# Altium PCB BMS ERROR Detection.PcbDoc
Units mil, origin at the board's own origin, x right, y up, seen from the top; angles counter-clockwise.
Board outline 2187.01 x 1799.61 mil, 2 copper layers (Top, Bottom); 9 components, 16 nets, 48 pads, 2 vias.
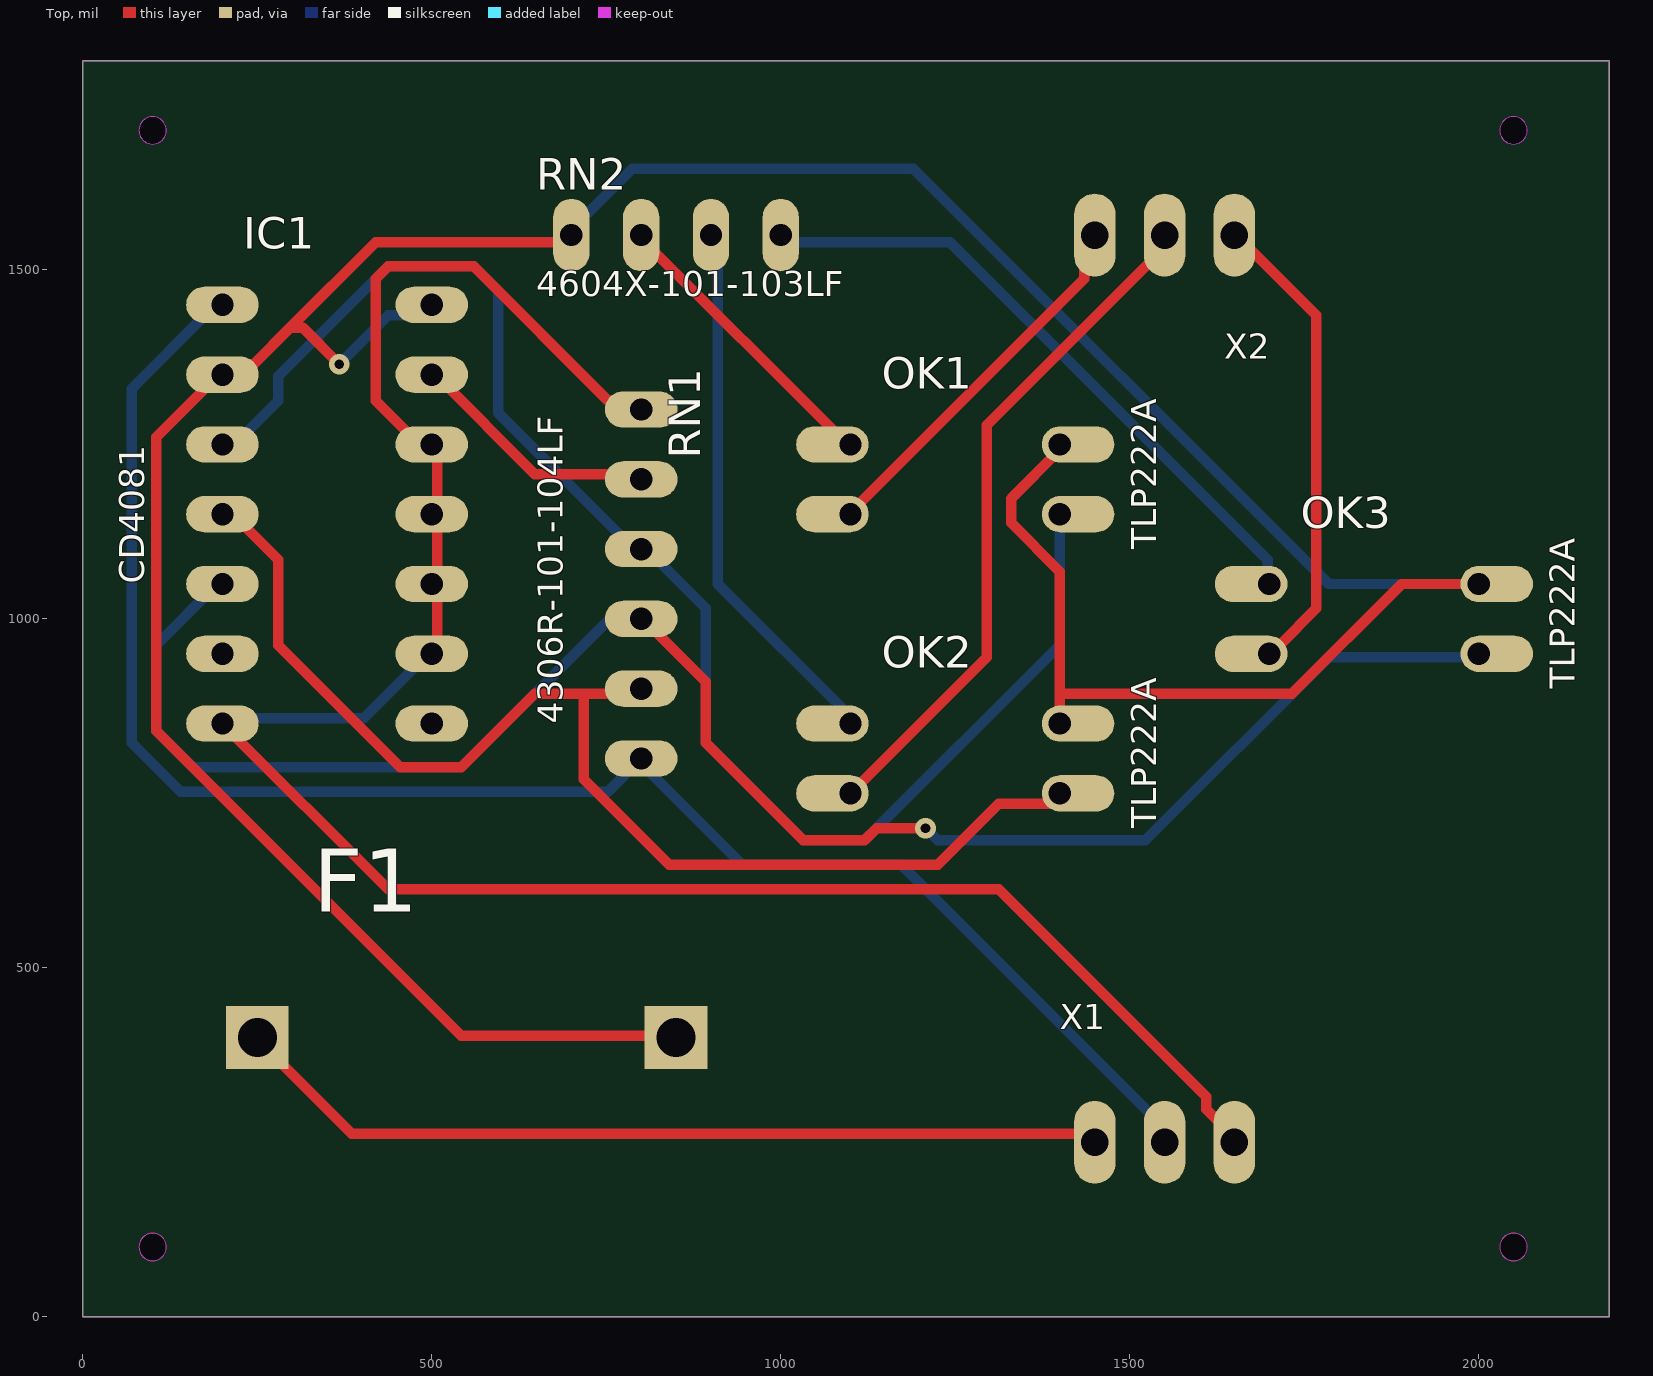
[diagram p0: Top view]
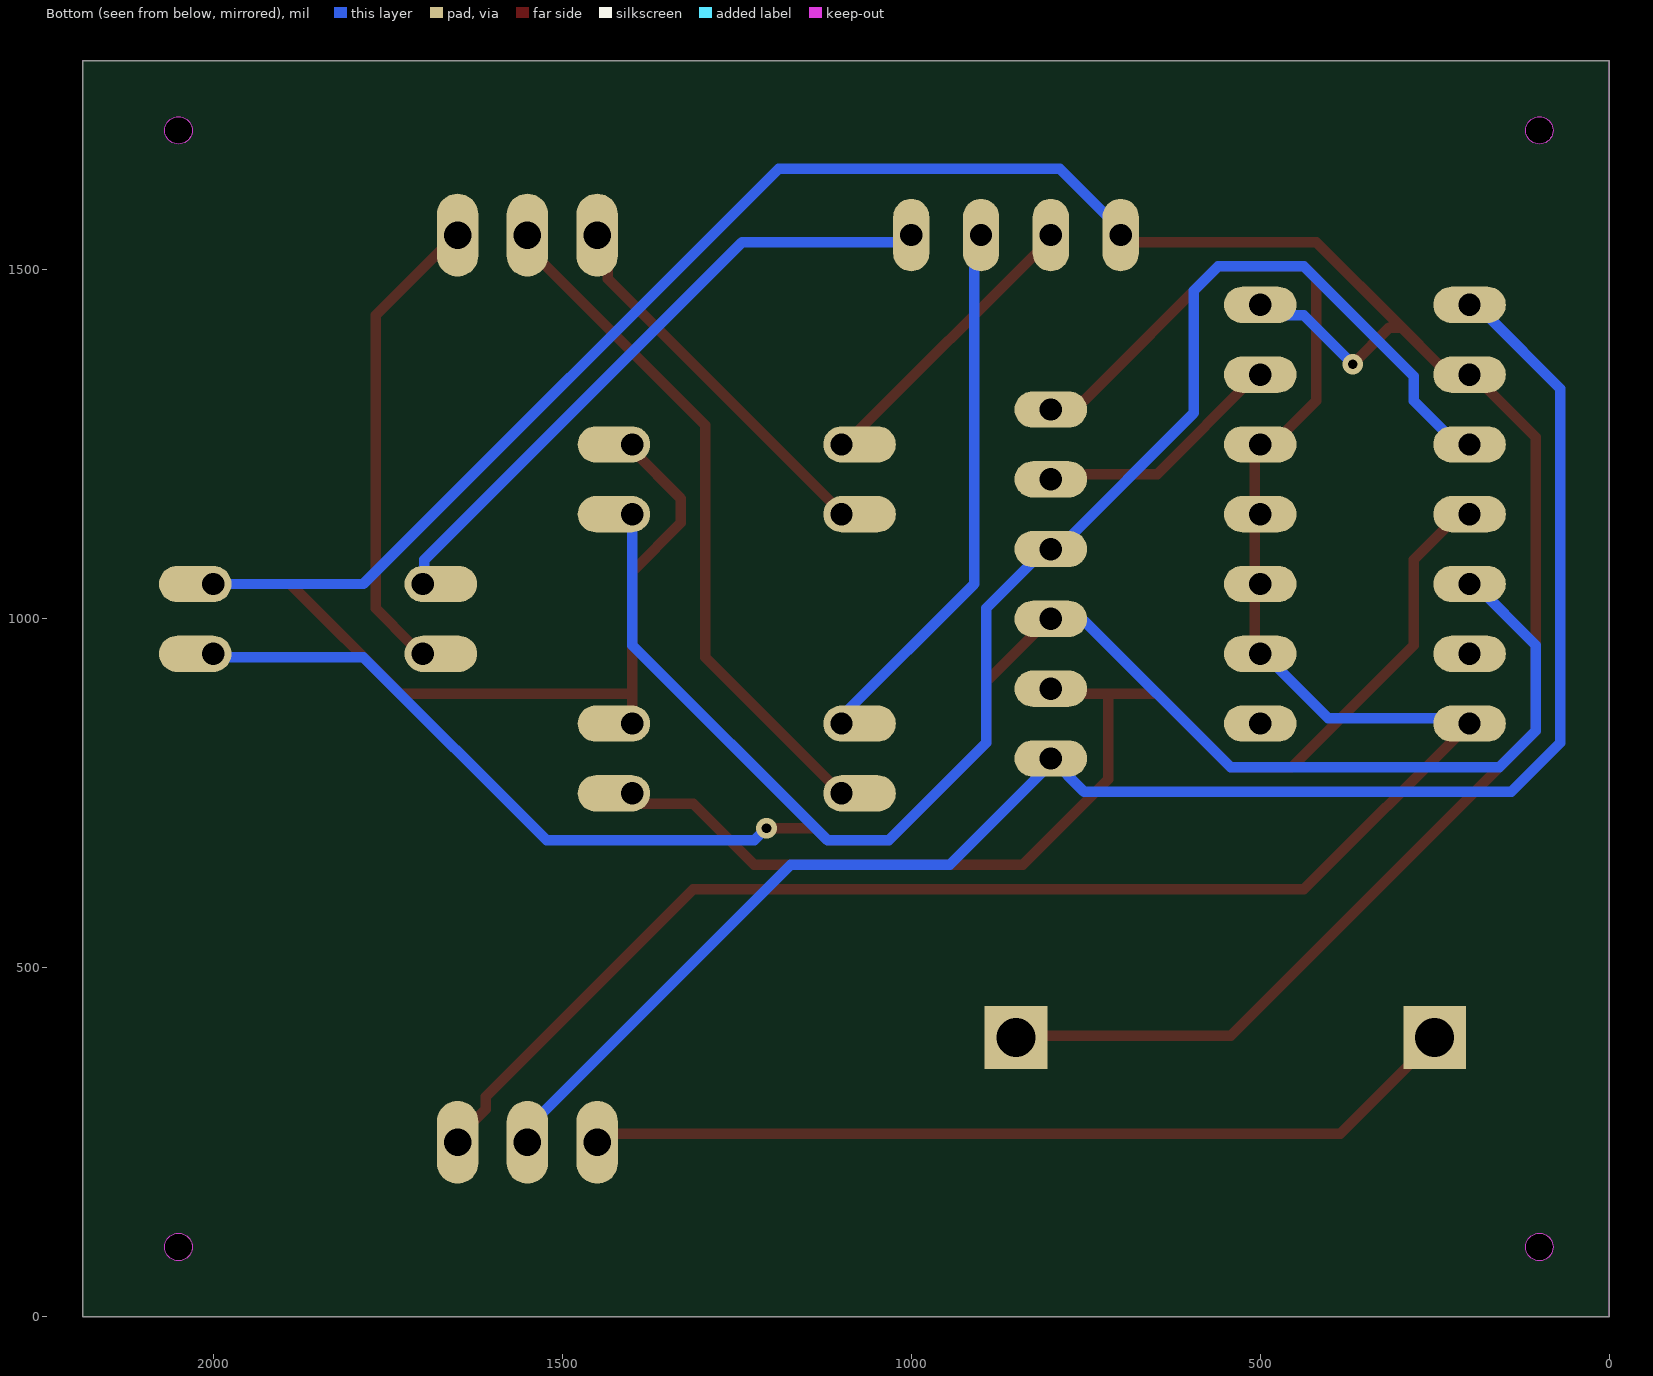
[diagram p1: Bottom view, seen from below]

## Layer stack, top to bottom
Top Solder: solder mask 0.4, Solder Resist, Dk 3.5
Top: signal copper 1.378
Dielectric 1: dielectric 12.6, FR-4, Dk 4.8
Bottom: signal copper 1.378
Bottom Solder: solder mask 0.4, Solder Resist, Dk 3.5

## Board outline
0,1799.61 0,0 2187.01,0 2187.01,1799.61
cut-out: 2050,80.31 ccw(c2050,100) 2069.68,100 ccw(c2050,100) 2050,119.69 ccw(c2050,100) 2030.32,100 ccw(c2050,100)
cut-out: 2050,1680.32 ccw(c2050,1700) 2069.68,1700 ccw(c2050,1700) 2050,1719.68 ccw(c2050,1700) 2030.32,1700 ccw(c2050,1700)
cut-out: 100,1680.32 ccw(c100,1700) 119.69,1700 ccw(c100,1700) 100,1719.68 ccw(c100,1700) 80.31,1700 ccw(c100,1700)
cut-out: 100,80.31 ccw(c100,100) 119.69,100 ccw(c100,100) 100,119.69 ccw(c100,100) 80.31,100 ccw(c100,100)

## Design rules (kind name [scope] priority, off if disabled: settings)
BoardOutlineClearance mdCopperDimension [All] p1: gap=10 ignorepadtopadclearanceinfootprint=FALSE except(0: Arc-SplitContinuation Track-SplitContinuation SMDPad-SplitContinuation THPad-SplitContinuation Via-SplitContinuation Fill-SplitContinuation Poly-SplitContinuation Region-SplitContinuation Text-SplitContinuation; 40: Poly-OutlineEdge Poly-CavityEdge Poly-CutoutEdge Poly-SplitBarrior)
Clearance "Clearance (Same Net)" [All] p1: gap=20 ignorepadtopadclearanceinfootprint=FALSE except(6: SMDPad-SMDPad SMDPad-THPad SMDPad-Via)
Clearance [All] p2: gap=20 ignorepadtopadclearanceinfootprint=FALSE
HoleSize [All] p1: absolutevalues=TRUE maxlimit=100000 minlimit=13.78 maxpercent=80.000 minpercent=20.000
HoleToHoleClearance mdDrill [All] p1: gap=6 allowstackedmicrovias=TRUE
MinimumSolderMaskSliver [All] p1 off: minsoldermaskwidth=10
PasteMaskExpansion mlMinCreamFrame [All] p1: expansion=0
PolygonConnect PolygonConnect_For_PolygonThermal_ON_Width60000_Gap100000 [InPolygonClass('PolygonThermal_ON_Width60000_Gap100000') vs Not IsVia] p1: connectstyle=Relief reliefconductorwidth=6 reliefentries=4 polygonreliefangle="90 Angle" airgapwidth=10
PolygonConnect ThermalVias [IsVia] p2: connectstyle=Direct reliefconductorwidth=10 reliefentries=4 polygonreliefangle="90 Angle" airgapwidth=10
PolygonConnect [All] p3: connectstyle=Relief reliefconductorwidth=10 reliefentries=4 polygonreliefangle="90 Angle" airgapwidth=10
RoutingVias [All] p1: holewidth=13.78 width=29.78 viastyle="Through Hole" minholewidth=13.78 minwidth=29.78 maxholewidth=100 maxwidth=100
SolderMaskExpansion mlMinStopFrame [All] p1: expansion=4 istentingtop=FALSE
Width [All] p1: maxlimit=10 minlimit=15 preferedwidth=15
26 further rules are at their usual default settings.

## Classes and differential pairs
polygon class PolygonThermal_ON_Width60000_Gap100000: Polygon_1_Net_N$6 Polygon_1_Net_N$7

## Components (designator, comment, footprint, x,y, rotation, side; value= is the part's Value field where it differs from the comment)
F1 "FUSEBLANK_5X20MM" FUSE_HOLDER_5X20MM 250,400 r0 top
IC1 "4082N" DIL14 350,1150 r270 top
OK1 "TLP222A" DIL04 1250,1200 r270 top
OK2 "TLP222A" DIL04 1250,800 r270 top
OK3 "TLP222A" DIL04 1850,1000 r270 top
RN1 "100k" SIL6 800,1050 r270 top
RN2 "1k" SIL4 850,1550 r0 top
X1 "22-23-2031" 22-23-2031 1550,250 r0 top
X2 "22-23-2031" 22-23-2031 1550,1550 r180 top

## Footprints (in the part's own frame and the unit in brackets; to place one, negate y for a bottom-side part, rotate by r counter-clockwise, add the part's x,y. Pads: shape width x height; smd on the part's side, far side on the other; paste and mask are expansions set on the pad)
22-23-2031 [mm] "22-23-2031"
  oval 1.508x3.016 hole 1: 1(-2.54,0) 2(0,0) 3(2.54,0)
  body extent -3.3,-1.51 3.3,1.51, height 1.27
DIL04 [mil] "DIL04"
  oval 52x104 hole 32 copper offset 0,-26: 1(-50,-150) 2(50,-150)
  oval 52x104 hole 32 copper offset 0,26: 3(50,150) 4(-50,150)
  body extent -76,-228 76,228, height 50
DIL14 [mil] "DIL14"
  oval 52x104 hole 32: 1(-300,-150) 2(-200,-150) 3(-100,-150) 4(0,-150) 5(100,-150) 6(200,-150) 7(300,-150) 8(300,150) 9(200,150) 10(100,150) 11(0,150) 12(-100,150) 13(-200,150) 14(-300,150)
  body extent -326,-202 326,202, height 50
FUSE_HOLDER_5X20MM [mil] "FUSE_HOLDER_5X20MM"
  rect 90x90 / inner round 83.15 / far side rect 90x90 hole 56: 1(0,0) 2(600,0)
  body extent -42,-42 642,42, height 50
SIL4 [mil] "SIL4"
  oval 52x104 hole 32: 1(-150,0) 2(-50,0) 3(50,0) 4(150,0)
  body extent -183,-52 176,52, height 150
SIL6 [mil] "SIL6"
  oval 52x104 hole 32: 1(-250,0) 2(-150,0) 3(-50,0) 4(50,0) 5(150,0) 6(250,0)
  body extent -283,-52 276,52, height 150

## Part data
F1: library part FUSE_HOLDER_5X20MM, PackageName=FUSE_HOLDER_5X20MM
IC1: library part DIL14, PackageName=DIL14
OK1 OK2 OK3: library part DIL04, PackageName=DIL04
RN1: library part SIL6, PackageName=SIL6
RN2: library part SIL4, PackageName=SIL4
X1 X2: PackageName=22-23-2031

## Free pads (board coordinates)
  round 39.37 hole 39.37 unplated: MH1(100,1700) MH2(100,100) MH3(2050,100) MH4(2050,1700)

## Via types
v1: diameter 29.78/29.78 (per signal layer), hole 13.78, Top to Bottom, 2 vias

## Nets (pads, with @x,y where several pads share a name; then routed paths per layer and width w, separated by ;. In a path a pad name is that pad's centre, name@x,y a point inside that pad or via, vN(x,y) a via of type N, cw(c..) or ccw(c..) an arc to the next point about the centre after c; other vN are vias at no path point)
+12V: F1.2 IC1.2 IC1.14 OK1.4 OK2.4 OK3.4 RN2.1 | length 5043.4
  Top w15: v1(367.5,1365) 315,1417.5 297.5,1417.5 ; RN2.1 700,1540 420,1540 297.5,1417.5 ; F1.2 840,402.5 542.5,402.5 105,840 105,1260 192.5,1347.5 IC1.2 210,1365 245,1365 297.5,1417.5 ; OK2.4 1400,892.5 ; OK1.4 1400,1242.5 1330,1172.5 1330,1137.5 1400,1067.5 1400,892.5 ; OK3.4 1890,1050 1732.5,892.5 1400,892.5
  Bottom w15: v1(367.5,1365) 437.5,1435 490,1435 IC1.14 ; RN2.1 700,1557.5 787.5,1645 1190,1645 1785,1050 OK3.4
BMS: IC1.1 RN1.6 X1.2 | length 2461.1
  Bottom w15: IC1.1 192.5,1435 175,1435 70,1330 70,822.5 140,752.5 752.5,752.5 RN1.6 805,787.5 945,647.5 1172.5,647.5 1540,280 1540,262.5 X1.2
BMS_ERR_1: IC1.3 OK1.3 RN1.3 | length 2192
  Bottom w15: IC1.3 210,1242.5 280,1312.5 280,1347.5 437.5,1505 560,1505 595,1470 595,1295 787.5,1102.5 RN1.3 805,1102.5 892.5,1015 892.5,822.5 1032.5,682.5 1120,682.5 1400,962.5 OK1.3
BMS_ERR_2: IC1.4 OK2.3 RN1.5 | length 1777.7
  Top w15: IC1.4 210,1155 280,1085 280,962.5 455,787.5 542.5,787.5 647.5,892.5 717.5,892.5 ; RN1.5 787.5,892.5 717.5,892.5 ; OK2.3 1400,735 1312.5,735 1225,647.5 840,647.5 717.5,770 717.5,892.5
BMS_ERR_3: IC1.5 OK3.3 RN1.4 | length 2565.3
  Top w15: RN1.4 805,997.5 892.5,910 892.5,822.5 1032.5,682.5 1120,682.5 1137.5,700 v1(1207.5,700)
  Bottom w15: IC1.5 192.5,1050 105,962.5 105,840 157.5,787.5 542.5,787.5 752.5,997.5 787.5,997.5 RN1.4 ; v1(1207.5,700) 1225,682.5 1522.5,682.5 1785,945 1995,945 OK3.3
CHARGE_EN: OK1.2 X2.3 | length 546.3
  Top w15: OK1.2 1102.5,1155 1435,1487.5 1435,1540 X2.3
CHARGE_SAFETY: OK3.2 X2.1 | length 678.3
  Top w15: X2.1 1662.5,1540 1767.5,1435 1767.5,1015 1715,962.5 OK3.2
DISCHARGE_EN: OK2.2 X2.2 | length 992
  Top w15: OK2.2 1295,945 1295,1277.5 1557.5,1540 X2.2
GND: IC1.7 IC1.9 IC1.10 IC1.11 IC1.12 RN1.1 X1.3 | length 3129.4
  Top w15: IC1.7 437.5,612.5 1312.5,612.5 1610,315 1610,297.5 1645,262.5 X1.3 ; IC1.9 507.5,962.5 IC1.10@507.5,1050 ; IC1.10 IC1.10@507.5,1050 ; RN1.1 787.5,1312.5 752.5,1312.5 560,1505 437.5,1505 420,1487.5 420,1312.5 490,1242.5 IC1.12 507.5,1242.5 507.5,1155 IC1.11 507.5,1137.5 IC1.10@507.5,1050
  Bottom w15: IC1.7 210,857.5 402.5,857.5 490,945 IC1.9
N$1: IC1.13 RN1.2 | length 360.5
  Top w15: IC1.13 507.5,1347.5 647.5,1207.5 787.5,1207.5 RN1.2
N$2: OK1.1 RN2.2 | length 425.2
  Top w15: RN2.2 805,1540 1085,1260 OK1.1
N$3: OK2.1 RN2.3 | length 784.3
  Bottom w15: RN2.3 910,1540 910,1050 1102.5,857.5 OK2.1
N$4: OK3.1 RN2.4 | length 926.5
  Bottom w15: RN2.4 1015,1540 1242.5,1540 1697.5,1085 1697.5,1050 OK3.1
N$5: F1.1 X1.1 | length 1262.3
  Top w15: F1.1 262.5,385 385,262.5 1435,262.5 X1.1
N$6: 
N$7: 
pads on no net: IC1.6 IC1.8

## Polygon pours and split planes (outlines as drawn)
N$6 on Top "Polygon_1_Net_N$6" (solid, remove dead copper, pour order 1): -103,1851.24 -103,-103 2353,-103 2353,1903 -51.24,1903
N$7 on Bottom "Polygon_1_Net_N$7" (solid, remove dead copper, pour order 0): -51.24,1903 -103,1851.24 -103,1800 -103,-103 2353,-103 2353,1903

## Keep-outs
Keep-Out Layer:
  the board outline again, w0

## Silkscreen, mask and mechanical layers (free items; w line width, h text height)
Top Overlay:
  text "4604X-101-103LF" at 650,1450 h62
  text "TLP222A" at 1550,1100 h62 r90
  text "CD4081" at 100,1050 h62 r90
  text "TLP222A" at 2150,900 h62 r90
  text "4306R-101-104LF" at 700,850 h62 r90
  text "TLP222A" at 1550,700 h62 r90
Dimension:
  the board outline again, w0

## Dimensions
2187.01,1799.61 to 0,1799.61 on tFinish
0,1799.61 to 0,0 on tFinish

## Text inside footprints (layer, text, board x,y; h text height)
RN1: tPlace "1" at 780,1390 h60.45 r270
RN2: tPlace "1" at 610,1530 h60.45